# Altium PCB PCB.PcbDoc
Units mm, origin at the board's own origin, x right, y up, seen from the top; angles counter-clockwise.
Board outline 35 x 25 mm, 2 copper layers (Top Layer, Bottom Layer); 1 components, 5 nets, 21 pads, 0 vias.
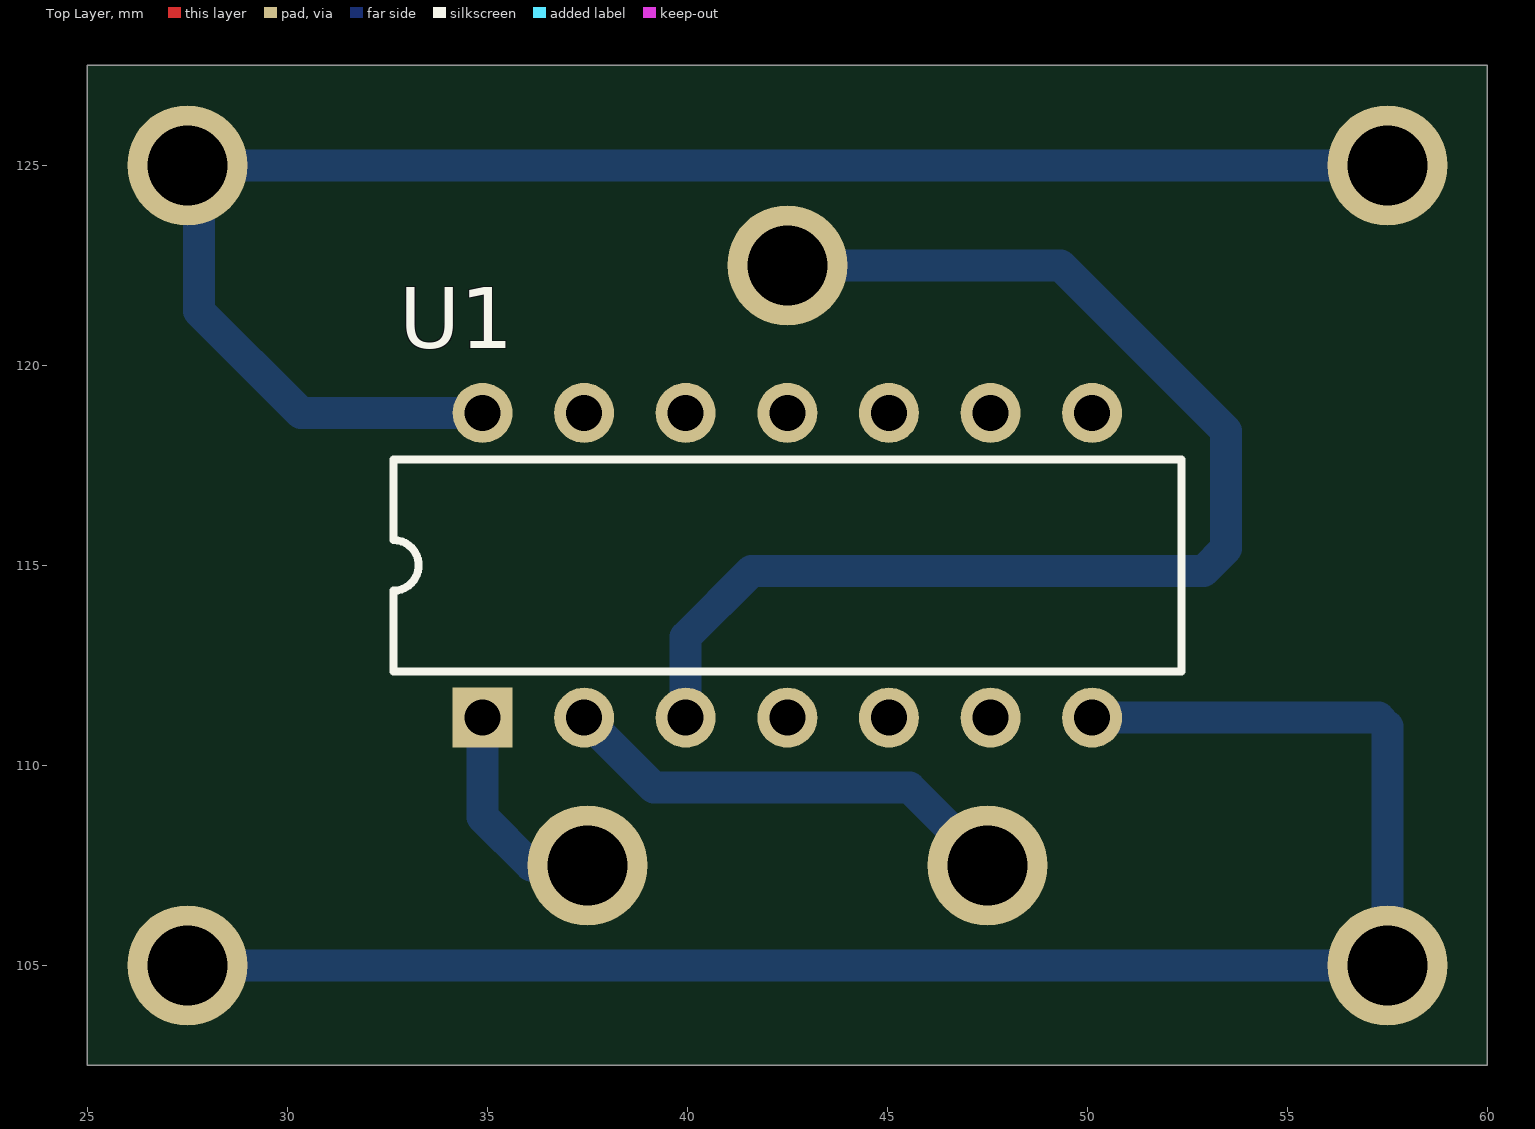
[diagram p0: Top Layer view]
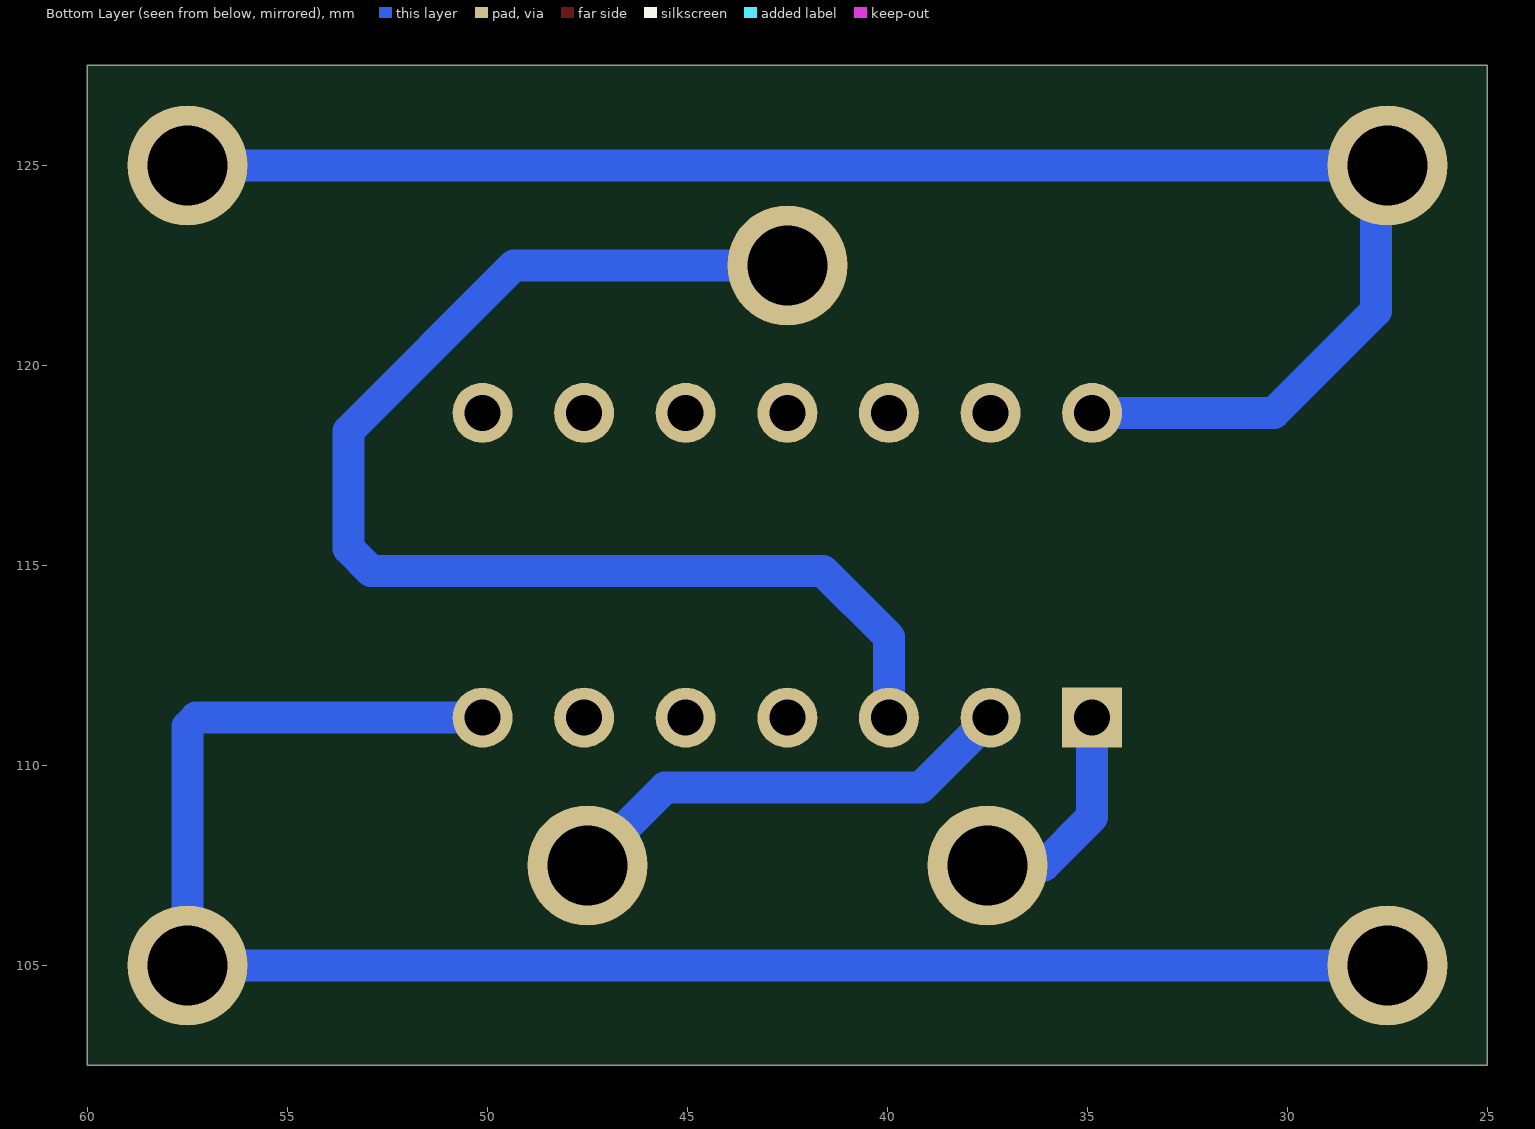
[diagram p1: Bottom Layer view, seen from below]

## Layer stack, top to bottom
Top Layer: signal copper 0.0356
Dielectric: dielectric 0.32, FR-4, Dk 4.8
Bottom Layer: signal copper 0.0356

## Board outline
25,102.5 60,102.5 60,127.5 25,127.5

## Design rules (kind name [scope] priority, off if disabled: settings)
Clearance Clearance_1 [IsRegion] p1: gap=1
Clearance [Not HasFootprint('LED')] p2: gap=0.6
PolygonConnect [All] p1: connectstyle=Relief reliefconductorwidth=0.254 reliefentries=4 polygonreliefangle="90 Angle"
RoutingVias [All] p1: holewidth=0.711 width=1.27 viastyle="Through Hole" minholewidth=0.711 minwidth=1.27 maxholewidth=0.711 maxwidth=1.27
SilkscreenOverComponentPads [All] p1: minsilkscreentomaskgap=0.254
SolderMaskExpansion SolderMaskExpansion_1 [HasFootprint('LED')] p1: expansion=0.15
SolderMaskExpansion [Not HasFootprint('LED')] p2: expansion=0.4
Width [All] p1: maxlimit=2 minlimit=0.6 preferedwidth=0.8
27 further rules are at their usual default settings.

## Components (designator, comment, footprint, x,y, rotation, side; value= is the part's Value field where it differs from the comment)
U1 "SN74AS32N" N014 42.5,115 r0 top

## Footprints (in the part's own frame and the unit in brackets; to place one, negate y for a bottom-side part, rotate by r counter-clockwise, add the part's x,y. Pads: shape width x height; smd on the part's side, far side on the other; paste and mask are expansions set on the pad)
N014 [mm] "DIP; 14 Leads; Row Spacing 7.62 mm; Pitch 2.54 mm"
  rect 1.5x1.5 hole 0.9: 1(-7.62,-3.81)
  round 1.5 hole 0.9: 2(-5.08,-3.81) 3(-2.54,-3.81) 4(0,-3.81) 5(2.54,-3.81) 6(5.08,-3.81) 7(7.62,-3.81) 8(7.62,3.81) 9(5.08,3.81) 10(2.54,3.81) 11(0,3.81) 12(-2.54,3.81) 13(-5.08,3.81) 14(-7.62,3.81)
  silkscreen extent -9.85,-2.65 9.85,2.65

## Part data
U1: "Quadruple 2-Input Positive-OR Gate"

## Free pads (board coordinates)
  round 3 hole 2: 33(27.5,125) 34(27.5,105) 35(57.5,105) 36(57.5,125) 37(42.5,122.5) 38(37.5,107.5) 39(47.5,107.5)

## Nets (pads, with @x,y where several pads share a name; then routed paths per layer and width w, separated by ;. In a path a pad name is that pad's centre, name@x,y a point inside that pad or via, vN(x,y) a via of type N, cw(c..) or ccw(c..) an arc to the next point about the centre after c; other vN are vias at no path point)
GND: pad.34 pad.35 U1.7 | length 43.4
  Bottom Layer w0.8: pad.34 pad.35 57.5,110.967 57.277,111.19 U1.7
IN1: pad.38 U1.1 | length 5.6
  Bottom Layer w0.8: U1.1 34.88,108.706 36.086,107.5 pad.38
IN2: pad.39 U1.2 | length 11.6
  Bottom Layer w0.8: U1.2 39.17,109.44 45.56,109.44 pad.39
OUT1: pad.37 U1.3 | length 32.1
  Bottom Layer w0.8: U1.3 39.96,113.214 41.605,114.859 52.908,114.859 53.467,115.418 53.467,118.364 49.331,122.5 pad.37
VCC: pad.33 pad.36 U1.14 | length 41.9
  Bottom Layer w0.8: U1.14 30.339,118.81 27.788,121.361 27.788,124.712 pad.33 pad.36
pads on no net: U1.4 U1.5 U1.6 U1.8 U1.9 U1.10 U1.11 U1.12 U1.13